# EAGLE board mixer_board_smd_autorouter (EAGLE 9.4.1)
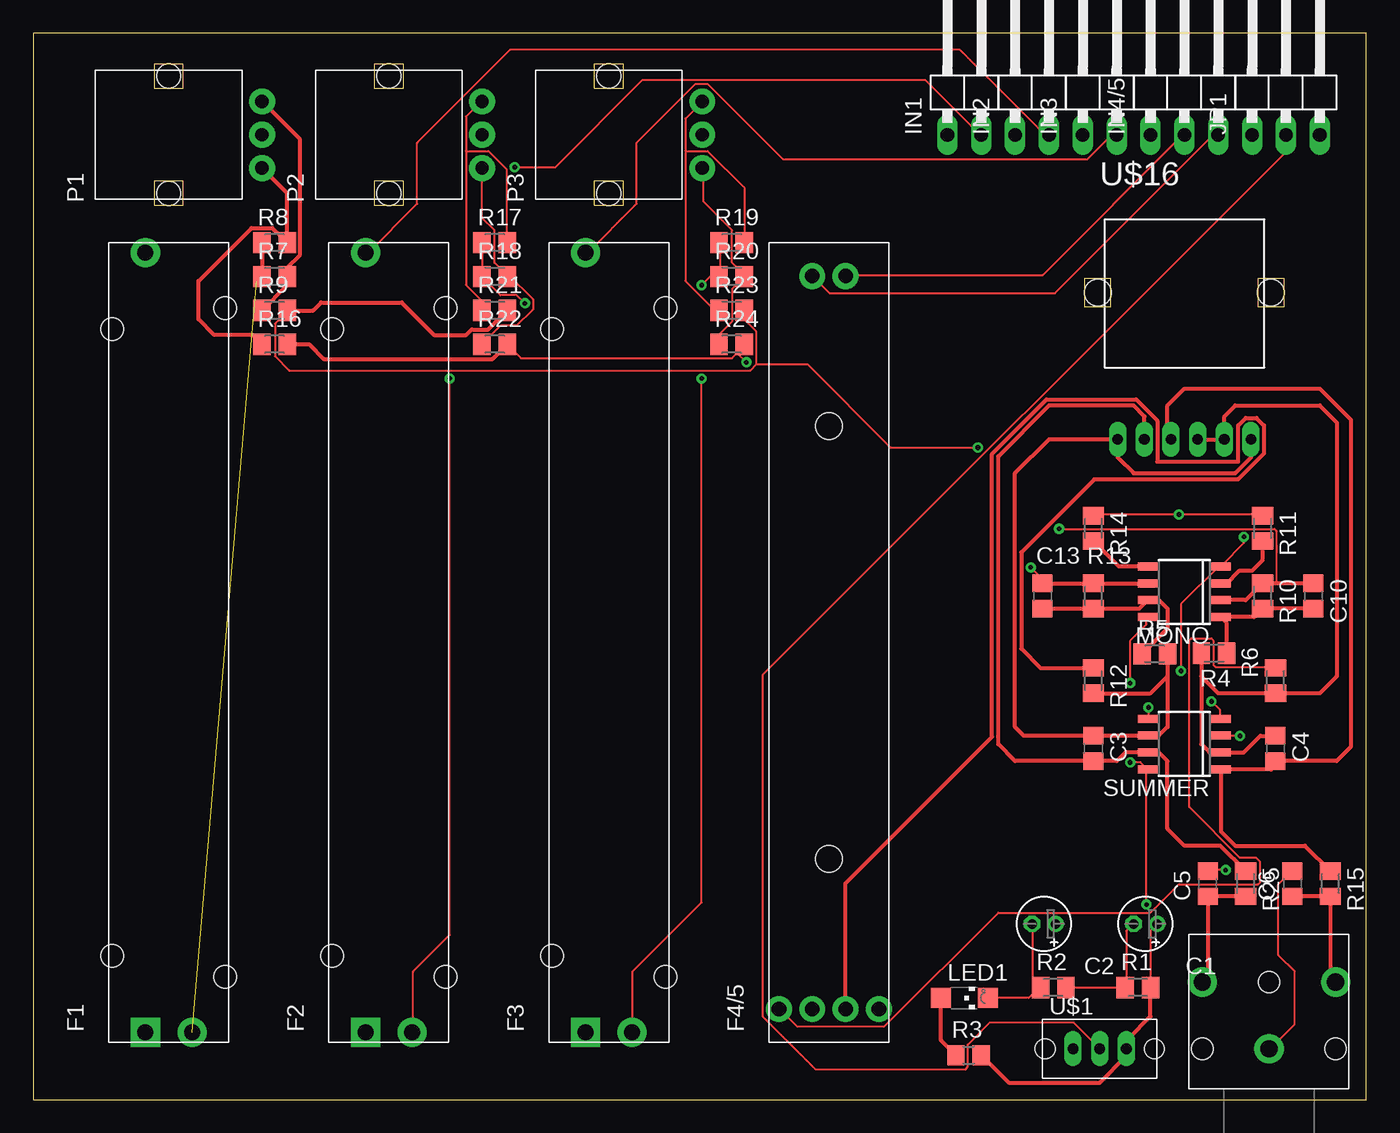
[diagram p0: board, top side]
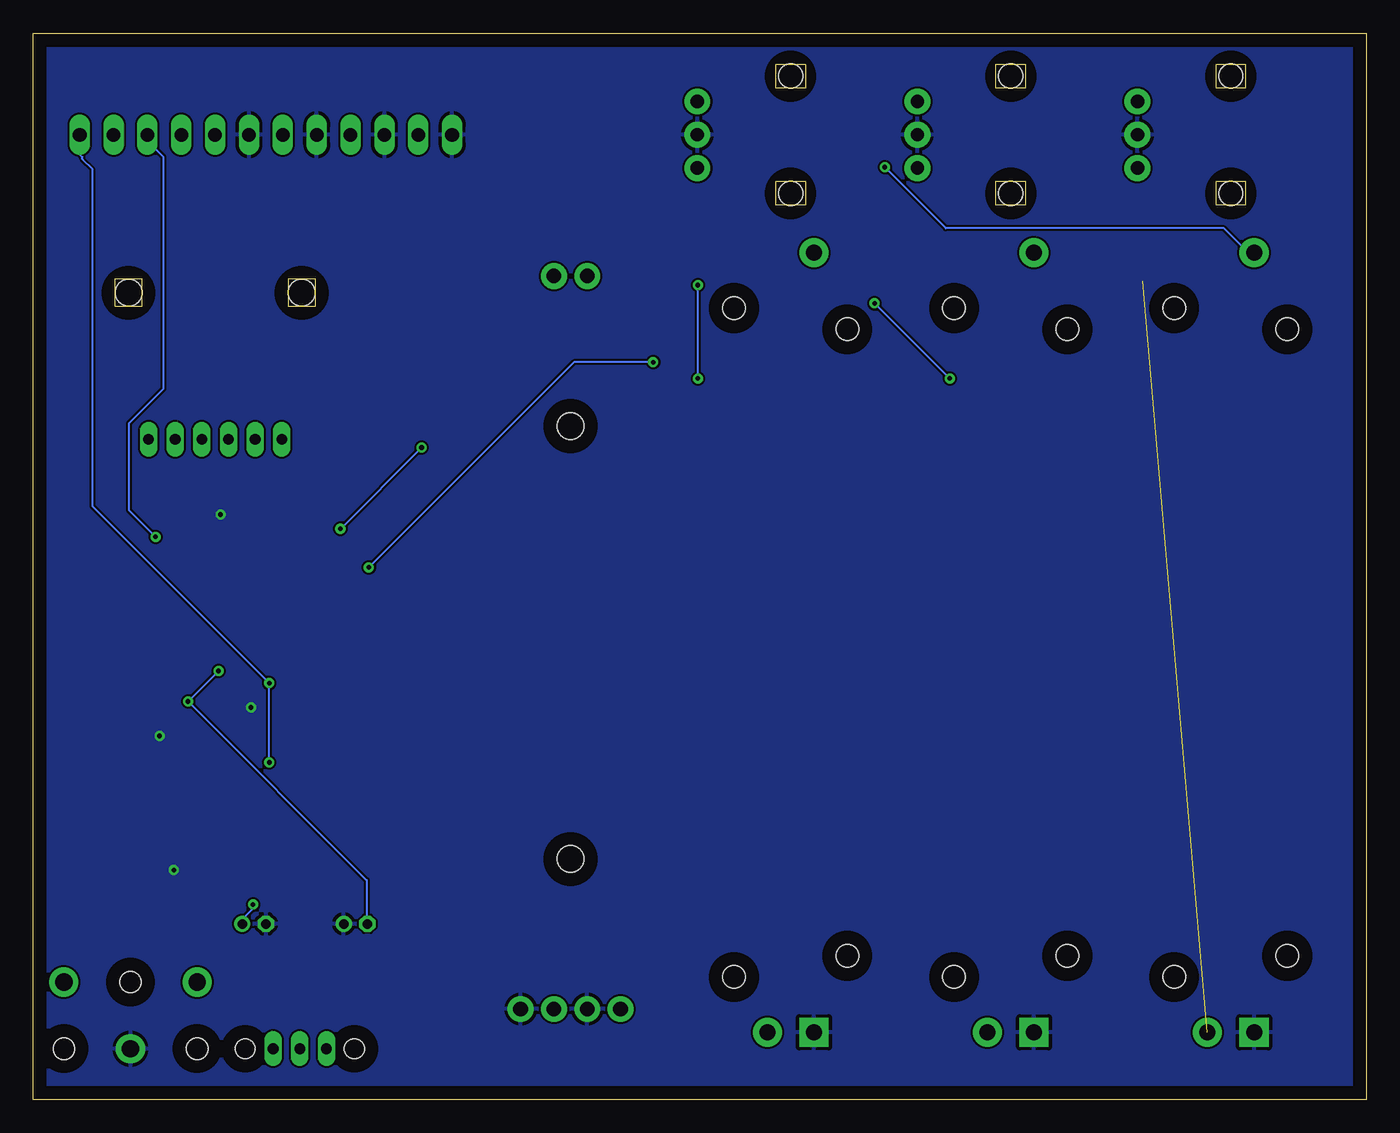
[diagram p1: board, bottom side, seen from below]

Size 100 x 80 mm. Coordinates in mm from the lower left corner, seen from the top.
Outline: 0,0 100,0 100,80 0,80 0,0
Copper layers (1*16): Top 0.035mm / dielectric 1.5mm / Bottom 0.035mm
Design rules "default": minimum track width 6mil, minimum drill 0.35mm, track to track 6mil, track to pad 6mil, pad to pad 6mil, via to via 6mil, smd to smd 6mil, copper to edge 40mil, drill to drill 6mil, minimum pad ring 10mil, minimum via ring 8mil, stop-mask expansion 4mil, vias tented up to drill 0mil, thermal gap 10mil

## Footprints (pad centres in the part's own frame; a part is rotated, then mirrored left to right if it is on the bottom)
E1,8-4 = drill 0.711 pad 1.168: + -0.889,0 | drill 0.711 pad 1.168 octagon: - 0.889,0
C0805 = smd 1.3 x 1.5: 1 -0.95,0; 2 0.95,0
PTA4553 = drill 1.2 pad 2.184 square: 1 -29.25,1.75 | drill 1.2 pad 2.184: 2 -29.25,-1.75; 3 29.25,1.75 | hole 1.7: -23.5,4.25; 23.5,4.25; -25.1,-4.25; 25.1,-4.25
PS45M = drill 1.1 pad 1.93: 1 -27.5,1.25; 1' -27.5,-3.75; 2 -27.5,3.75; 2' -27.5,-1.25; 3 27.5,1.25; 3' 27.5,-1.25 | hole 2: -16.25,0; 16.25,0
1X02/90 = drill 1.016 long: 1 -1.27,-3.81; 2 1.27,-3.81
1X03/90 = drill 1.016 long: 1 -2.54,-3.81; 2 0,-3.81; 3 2.54,-3.81
CHIPLED_1206 = smd 1.5 x 1.5: A 0,-1.75; C 0,1.75
SOIC8 = smd 0.6 x 1.5: 1 -1.905,-2.75; 2 -0.635,-2.75; 3 0.635,-2.75; 4 1.905,-2.75; 5 1.905,2.75; 6 0.635,2.75; 7 -0.635,2.75; 8 -1.905,2.75
PTV09A = drill 1 pad 1.93: 1 -2.5,-7; 2 0,-7; 3 2.5,-7 | hole 1.8: -4.4,0; 4.4,0
M0805 = smd 1.3 x 1.6: 1 -0.95,0; 2 0.95,0
R0805 = smd 1.3 x 1.5: 1 -0.95,0; 2 0.95,0
OS102011 = drill 0.8 long: 1 -2,0; 2 0,0; 3 2,0 | hole 1.5: -4.1,0; 4.1,0
STX-3120 = drill 1.3 pad 2.184: 1 0,0; 2 5,-5; 5 5,5 | hole 1.6: 0,5; 0,-5; 5,0
RK12 = drill 0.8 long: 1 -1,0; 1' -3,0; 2 1,0; 2' -5,0; 3 3,0; 3' 5,0 | hole 2: -6.5,11; 6.5,11

## Placement (x,y rotation side)
C1  [E1,8-4]  83.44,13.18 180 top
C2  [E1,8-4]  75.82,13.18 180 top
C3  10pF  [C0805]  79.53,26.35 270 top
C4  10pF  [C0805]  93.19,26.35 270 top
C5  10pF  [C0805]  88.11,16.2 90 top
C6  10pF  [C0805]  94.46,16.2 90 top
C10  10pF  [C0805]  96.04,37.78 270 top
C13  10pF  [C0805]  75.72,37.78 270 top
F1  PTA4553  [PTA4553]  10.16,34.29 90 top
F2  PTA4553  [PTA4553]  26.67,34.29 90 top
F3  PTA4553  [PTA4553]  43.18,34.29 90 top
F4/5  PS45M  [PS45M]  59.69,34.29 90 top
IN1  [1X02/90]  69.85,76.2 0 top
IN2  [1X02/90]  74.93,76.2 0 top
IN3  [1X02/90]  80.01,76.2 0 top
IN4/5  [1X03/90]  86.36,76.2 0 top
JP1  [1X03/90]  93.98,76.2 0 top
LED1  [CHIPLED_1206]  69.85,7.62 270 top
MONO  TL072SOIC8  [SOIC8]  86.36,38.1 90 top
P1  10k  [PTV09A]  10.16,72.39 90 top
P2  10k  [PTV09A]  26.67,72.39 90 top
P3  10k  [PTV09A]  43.18,72.39 90 top
R1  [M0805]  82.87,8.41 0 top
R2  [M0805]  76.52,8.41 0 top
R3  [R0805]  70.17,3.33 0 top
R4  51k  [M0805]  88.58,33.5 180 top
R5  51k  [M0805]  84.14,33.43 0 top
R6  22k  [M0805]  93.19,31.43 270 top
R7  15k  [M0805]  18.1,61.75 0 top
R8  15k  [M0805]  18.1,64.29 0 top
R9  15k  [M0805]  18.1,59.21 0 top
R10  51k  [M0805]  92.23,37.78 270 top
R11  22k  [M0805]  92.23,42.86 270 top
R12  22k  [M0805]  79.53,31.43 270 top
R13  390k  [M0805]  79.53,37.78 270 top
R14  22k  [M0805]  79.53,42.86 270 top
R15  51k  [M0805]  97.31,16.19 270 top
R16  15k  [M0805]  18.1,56.67 0 top
R17  15k  [M0805]  34.61,64.29 0 top
R18  15k  [M0805]  34.61,61.75 0 top
R19  15k  [M0805]  52.39,64.29 0 top
R20  15k  [M0805]  52.39,61.75 0 top
R21  15k  [M0805]  34.61,59.21 0 top
R22  15k  [M0805]  34.61,56.67 0 top
R23  15k  [M0805]  52.39,59.21 0 top
R24  15k  [M0805]  52.39,56.67 0 top
R25  51k  [M0805]  90.96,16.19 270 top
SUMMER  TL072SOIC8  [SOIC8]  86.36,26.67 90 top
U$1  OS102011  [OS102011]  80.01,3.81 0 top
U$13  STX-3120-3B  [STX-3120]  92.71,3.81 90 top
U$16  RK12  [RK12]  86.36,49.53 0 top

## Library data of the parts
C1-C6 C10 C13 R1-R25 = resistor
F1-F3 F4/5 MONO P1-P3 SUMMER U$1 U$13 U$16 = biblib
IN1-IN3 IN4/5 JP1 = pinhead
LED1 = led

## Nets
GND: C1.- C2.+ C5.2 C6.2 F1.1 F2.1 F3.1 F4/5.1 F4/5.1' IN1.1 IN2.1 IN3.1 IN4/5.1 P1.2 P2.2 P3.2 R1.1 R2.2 R11.1 R14.1 SUMMER.3 SUMMER.5 U$13.1
N$1: JP1.2 U$1.2
N$2: LED1.A R3.1
N$5: F4/5.3 IN4/5.3
N$6: F4/5.3' IN4/5.2
N$7: C4.2 R15.1 SUMMER.1 U$16.1
N$14: F1.2 R7.1 R8.1
N$15: F4/5.2 R6.1
N$16: P1.3 R7.2 R9.1
N$17: P1.1 R8.2 R16.1
N$18: C10.1 MONO.2 R9.2 R10.1 R21.2 R23.2
N$19: C10.2 MONO.1 R4.1 R10.2
N$20: C6.1 R15.2 U$13.2
N$21: C4.1 R4.2 R6.2 SUMMER.2 U$16.2 U$16.3
N$22: MONO.3 R11.2
N$23: P2.3 R17.2 R21.1
N$24: C13.2 MONO.7 R5.1 R13.2
N$25: C5.1 R25.2 U$13.5
N$26: MONO.5 R14.2
N$27: F4/5.2' R12.1
N$29: C3.2 R25.1 SUMMER.7 U$16.1'
N$30: C13.1 MONO.6 R13.1 R16.2 R22.2 R24.2
N$31: P2.1 R18.2 R22.1
N$33: C3.1 R5.2 R12.2 SUMMER.6 U$16.2' U$16.3'
N$35: P3.3 R19.2 R23.1
N$36: P3.1 R20.2 R24.1
N$37: F1.3 IN1.2
N$38: F2.3 IN2.2
N$39: F2.2 R17.1 R18.1
N$42: F3.2 R19.1 R20.1
N$46: F3.3 IN3.2
V+: C1.+ JP1.3 MONO.8 R1.2 R3.2 SUMMER.8 U$1.3
V-: C2.- JP1.1 LED1.C MONO.4 R2.1 SUMMER.4

## Tracks (layer width: path | path; a pad name or v marks a point on that pad's centre or on a via)
GND  (via drill 0.35)
  Top 0.152: R14.1 79.55,43.89 v85.95,43.89 92.2,43.89 R11.1 | R2.2 77.57,8.38 81.84,8.38 R1.1 81.99,8.53 81.99,12.65 82.45,13.11 C1.- | v89.46,17.22 88.24,17.22 C5.2 | C6.2 94.34,17.07 93.42,16.15 93.42,10.82 94.64,9.6 94.64,5.64 92.81,3.81 U$13.1 | v90.53,27.28 89.15,27.28 SUMMER.3 | v83.67,29.41 83.67,28.65 SUMMER.5
  pour Bottom: 0,80.01 0,0 100.33,0 100.33,80.01
N$1
  Top 0.152: U$1.2 78.03,5.79 71.78,5.79 70.1,4.12 70.1,2.44 69.95,2.29 58.67,2.29 54.71,6.25 54.71,31.85 93.88,71.02 93.88,72.39 JP1.2
N$2
  Top 0.305: R3.1 68.1,4.45 LED1.A
N$5
  Top 0.152: IN4/5.3 88.54,72.39 76.66,60.5 59.74,60.5 58.52,61.72 F4/5.3
N$6
  Top 0.152: IN4/5.2 86.26,72.39 75.74,61.87 60.96,61.87 F4/5.3'
N$7
  Top 0.305: R15.1 95.4,19.05 90.17,19.05 89.11,20.11 SUMMER.1 92.86,24.77 C4.2 97.79,25.4 98.83,26.44 98.83,51.03 96.52,53.34 86.36,53.34 85.09,52.07 85.09,49.8 U$16.1
N$14  (1 unrouted)
  Top 0.152: 16.76,61.42 17.07,61.72 R7.1
  Top 0.305: R8.1 R7.1
N$15
  Top 0.152: R6.1 93.12,32.46 88.7,32.46 88.54,32.61 88.54,34.44 88.39,34.59 86.87,34.59 86.72,34.44 86.72,21.95 90.53,18.14 91.75,18.14 92.05,17.83 92.05,16.31 91.9,16.15 85.95,16.15 83.82,14.02 72.39,14.02 63.86,5.49 57.3,5.49 56.08,6.71 F4/5.2
N$16
  Top 0.305: R9.1 19.05,61.11 R7.2 19.05,62.41 20,63.36 20,72.05 P1.3
N$17
  Top 0.305: R8.2 19.05,64.77 | 19.05,64.77 19.05,68 P1.1 | 19.05,64.77 18.55,64.77 17.93,65.39 16.37,65.39 12.39,61.41 12.39,58.55 13.57,57.37 16.45,57.37 R16.1
N$18  (via drill 0.35)
  Top 0.152: R23.2 53.34,58.52 54.25,57.61 54.25,55.17 | 54.25,55.17 53.8,54.71 19.2,54.71 18.14,55.78 18.14,58.22 19.05,59.13 R9.2 | 93.27,38.73 93.27,42.67 93.12,42.82 v76.96,42.82 | v70.87,48.92 64.31,48.92 58.06,55.17 54.25,55.17
  Top 0.305: R9.2 20.99,59.21 21.58,59.81 27.65,59.81 30.08,57.37 32.48,57.37 32.88,57.77 34.12,57.77 R21.2 | MONO.2 90.97,37.47 R10.1 93.27,38.73 C10.1
  Bottom 0.152: v70.87,48.92 v76.96,42.82
N$19
  Top 0.305: C10.2 R10.2 91.59,36.2 MONO.1 89.53,35.77 R4.1
N$20
  Top 0.305: C6.1 R15.2 97.31,9.21 U$13.2
N$21
  Top 0.305: R4.2 87.63,31.75 | 87.63,31.75 87.63,26.67 88.27,26.04 SUMMER.2 90.81,26.04 92.07,27.3 C4.1 | 87.63,31.75 88.9,30.48 R6.2 96.52,30.48 97.79,31.75 97.79,50.8 96.52,52.07 90.17,52.07 89.36,51.26 U$16.3 U$16.2
N$22
  Top 0.305: MONO.3 89.53,38.73 90.48,39.69 91.44,39.69 92.23,40.48 R11.2
N$23
  Top 0.152: 32.46,71.17 32.46,73.76 33.53,74.83 P2.3 | 32.46,71.17 32.46,61.11 33.53,60.05 33.53,59.28 R21.1 | 32.46,71.17 34.14,71.17 35.51,69.8 35.51,64.31 R17.2
N$24
  Top 0.305: C13.2 R13.2 82.97,36.83 MONO.7 84.45,37.47 85.09,36.83 85.09,35.33 R5.1
N$25
  Top 0.305: R25.2 C5.1 88.11,9.21 U$13.5
N$26
  Top 0.305: MONO.5 81.44,40.01 R14.2
N$27
  Top 0.305: F4/5.2' 60.94,16.22 71.93,27.22 71.93,48.45 76.01,52.53 82.74,52.53 84.32,50.95 84.32,47.87 90.4,47.87 90.4,50.58 90.96,51.14 91.76,51.14 92.32,50.58 92.32,48.48 90.37,46.53 79.59,46.53 74.12,41.06 74.12,33.83 75.57,32.38 R12.1
N$29
  Top 0.305: R25.1 89.05,19.05 86.36,19.05 85.09,20.32 85.09,25.4 84.45,26.04 SUMMER.7 81.92,26.04 81.28,25.4 C3.2 73.66,25.4 72.39,26.67 72.39,48.26 76.2,52.07 82.55,52.07 83.36,51.26 U$16.1'
N$30  (via drill 0.35)
  Top 0.152: 52.73,55.93 52.43,55.63 36.58,55.63 35.66,56.54 R22.2 | 52.73,55.93 53.34,56.54 R24.2 52.73,55.93 | v74.83,39.93 75.59,39.17 75.59,38.86 C13.1 | v53.49,55.32 52.88,55.93 52.73,55.93
  Top 0.305: R16.2 20.69,56.67 21.79,55.56 34.45,55.56 R22.2 | MONO.6 R13.1 C13.1
  Bottom 0.152: v74.83,39.93 59.44,55.32 v53.49,55.32
N$31
  Top 0.152: R22.1 33.68,56.69 35.05,58.06 36.27,58.06 37.49,59.28 37.49,60.05 35.66,61.87 R18.2 35.51,61.87 34.59,62.79 34.59,65.23 33.68,66.14 33.68,69.8 P2.1
N$33
  Top 0.305: R5.2 85.09,31.75 | 85.09,31.75 85.09,27.94 84.45,27.3 SUMMER.6 C3.1 74.3,27.3 73.66,27.94 73.66,46.99 76.2,49.53 U$16.2' 81.36,48.18 82.55,46.99 90.17,46.99 91.36,48.18 U$16.3' | R12.2 83.82,30.48 85.09,31.75
N$35
  Top 0.152: 48.92,71.17 48.92,73.61 50.14,74.83 P3.3 | 48.92,71.17 48.92,61.42 51.05,59.28 51.36,59.28 R23.1 | R19.2 53.34,68.43 50.6,71.17 48.92,71.17
N$36
  Top 0.152: R24.1 51.51,56.69 51.51,57.45 52.43,58.37 52.43,60.81 53.34,61.72 R20.2 53.34,61.87 52.43,62.79 52.43,65.23 50.29,67.36 50.29,69.8 P3.1
N$37  (via drill 0.35)
  Top 0.152: v36.12,69.95 39.17,69.95 45.72,76.5 66.9,76.5 71.02,72.39 IN1.2
  Bottom 0.152: v36.12,69.95 31.55,65.38 10.67,65.38 8.84,63.55 8.53,63.55 F1.3
N$38
  Top 0.152: IN2.2 75.89,72.39 69.49,78.79 35.81,78.79 28.8,71.78 28.8,67.21 24.99,63.4 F2.3
N$39  (via drill 0.35)
  Top 0.152: R17.1 33.68,64.16 33.68,61.87 R18.1 33.68,61.72 35.05,60.35 36.27,60.35 v36.88,59.74 | v31.24,54.1 31.24,12.34 28.5,9.6 28.5,5.18 F2.2
  Bottom 0.152: v31.24,54.1 v36.88,59.74
N$42  (via drill 0.35)
  Top 0.152: R19.1 51.51,64.16 51.51,61.87 R20.1 51.36,61.72 50.75,61.72 v50.14,61.11 | v50.14,54.1 50.14,14.78 44.96,9.6 44.96,5.18 F3.2
  Bottom 0.152: v50.14,54.1 v50.14,61.11
N$46
  Top 0.152: IN3.2 80.92,72.39 79.1,70.56 56.24,70.56 50.6,76.2 49.68,76.2 45.26,71.78 45.26,67.21 41.45,63.4 F3.3
V+  (via drill 0.35)
  Top 0.152: v83.52,14.63 83.52,24.69 SUMMER.8 83.52,24.84 83.06,25.3 v82.3,25.3 | v82.3,31.24 82.3,34.44 83.52,35.66 83.52,36.12 MONO.8 | R1.2 83.82,12.65 84.28,13.11 C1.+
  Top 0.305: R1.2 83.82,6.23 82.19,4.61 82.19,3.99 U$1.3 82.01,3.27 80.01,1.27 73.18,1.27 R3.2
  Bottom 0.152: v83.52,14.63 83.52,14.33 84.28,13.56 84.28,13.26 C1.+ | v82.3,25.3 v82.3,31.24 95.56,44.5 95.56,69.8 96.32,70.56 96.32,70.71 96.47,70.87 96.47,72.39 JP1.3
V-  (via drill 0.35)
  Top 0.152: LED1.C 74.68,7.62 75.44,8.38 R2.1 75.44,8.53 74.98,8.99 74.98,13.11 C2.- | v88.39,29.87 89,29.26 89,28.65 SUMMER.4 | v86.11,32.16 86.11,37.19 89,40.08 MONO.4 89.15,40.08 90.83,41.76 v90.83,42.22
  Bottom 0.152: v86.11,32.16 v88.39,29.87 74.98,16.46 74.98,13.26 C2.- | JP1.1 91.44,71.93 90.22,70.71 90.22,53.34 92.81,50.75 92.81,44.2 v90.83,42.22